# Altium PCB 矩形板V4.0.pcbdoc (part 2 of 2)
Units mm, origin at the board's own origin, x right, y up, seen from the top; angles counter-clockwise.
Board outline 153.79 x 190.97 mm, 2 copper layers (Top Layer, Bottom Layer); 164 components, 217 nets, 717 pads, 298 vias.
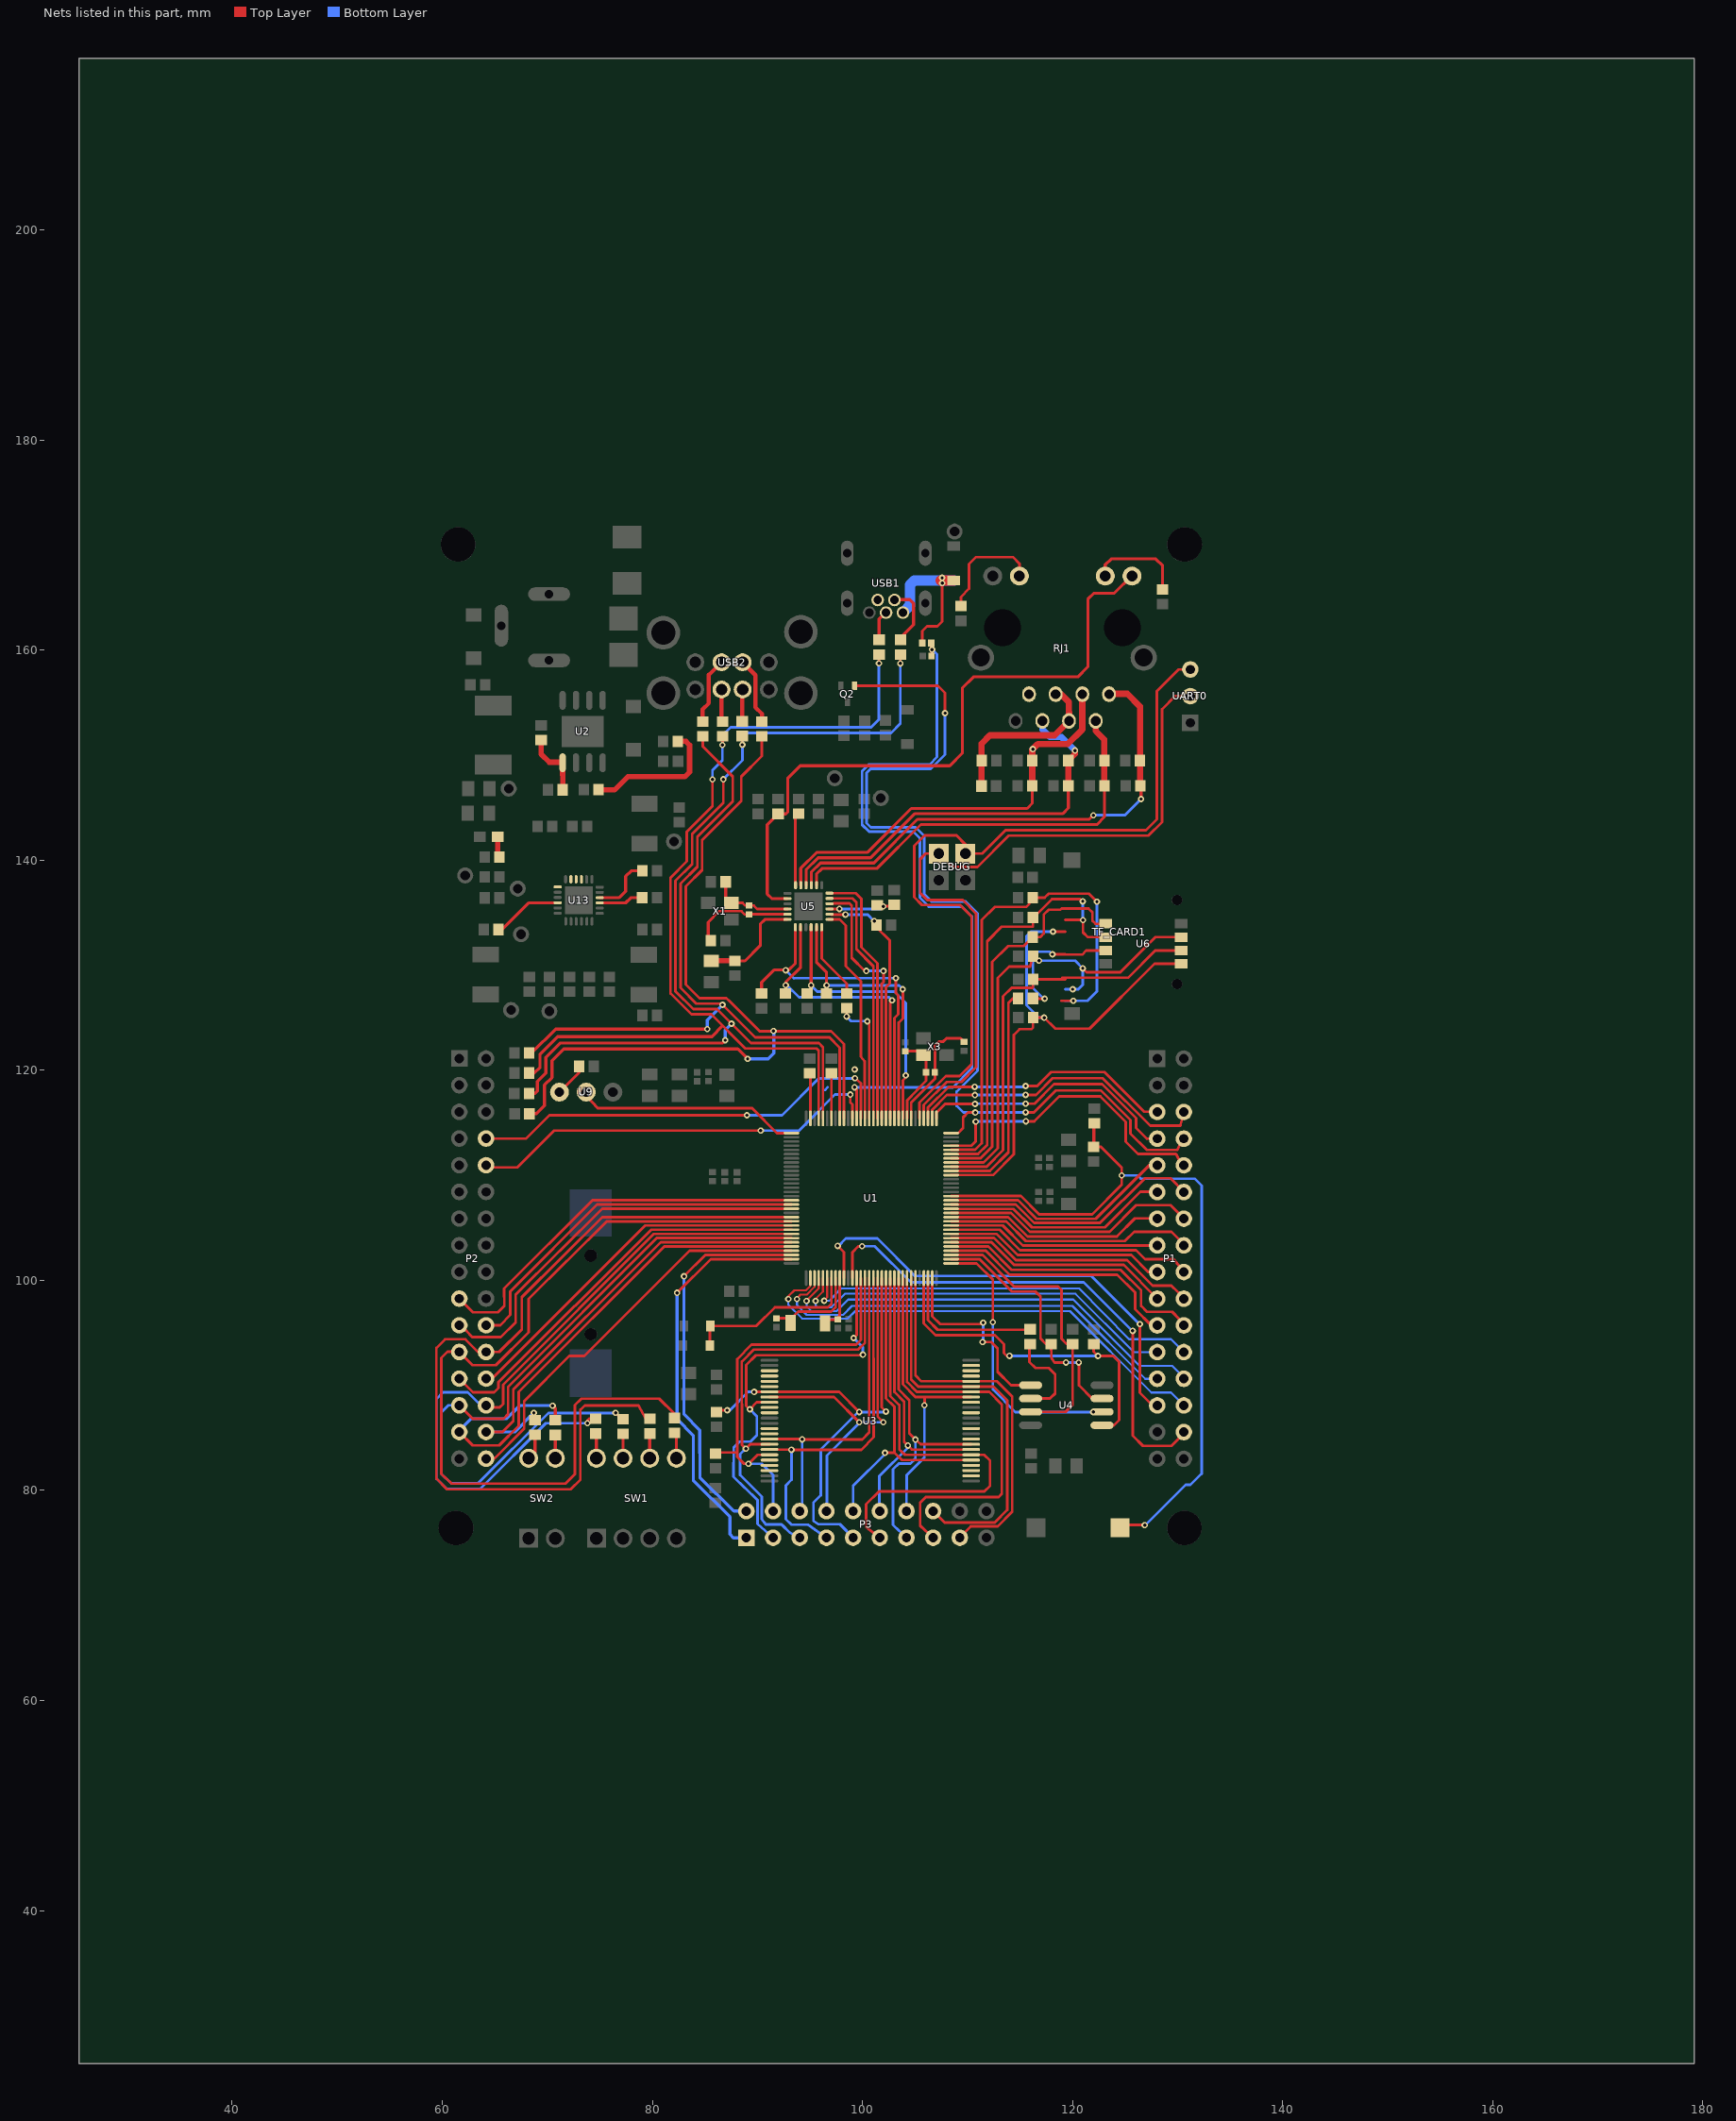
[diagram p2: the nets of this part, all layers, seen from the top]

## Via types
v1: diameter 0.61, hole 0.305, Top Layer to Bottom Layer, 298 vias

## Nets (pads, with @x,y where several pads share a name; then routed paths per layer and width w, separated by ;. In a path a pad name is that pad's centre, name@x,y a point inside that pad or via, vN(x,y) a via of type N, cw(c..) or ccw(c..) an arc to the next point about the centre after c; other vN are vias at no path point) (continued)
PA10: P2.19 U1.17 | length 37.6
  Top Layer w0.254: P2.19@61.621,98.259 62.921,96.959 65.301,96.959 65.903,97.561 65.893,99.222 74.303,107.619 U1.17@93.241,107.619
PA11: P2.22 U1.18 | length 35.2
  Top Layer w0.254: P2.22@64.161,95.719 65.512,95.719 66.48,96.695 66.48,98.93 74.727,107.221 U1.18@93.241,107.221
PA12: P2.21 U1.19 | length 38.7
  Top Layer w0.254: P2.21@61.601,95.719 61.799,95.719 62.848,94.609 65.583,94.604 66.983,95.996 66.98,98.635 75.223,106.819 U1.19@93.241,106.819
PB0: P2.32 U1.29 | length 38.8
  Top Layer w0.254: P2.32@64.161,83.019 64.931,83.019 67.796,85.882 67.788,88.488 72.088,92.793 73.518,92.796 83.541,102.819 U1.29@93.241,102.819
PB1: P1.26 U1.36 | length 42.9
  Top Layer w0.2: v1@94.72,98.099 95.84,99.217 U1.36@95.839,100.219
  Bottom Layer w0.2: v1(94.681,98.039) 94.682,97.538 95.162,97.058 97.521,97.058 98.641,98.178 120.071,98.178 126.401,91.849 129.491,91.849 P1.26@130.711,90.629
PB2: P1.24 U1.38 | length 39.6
  Top Layer w0.2: v1@96.341,98.099 96.64,98.398 U1.38@96.64,100.219
  Bottom Layer w0.2: v1(96.361,98.059) 96.874,98.059 97.973,99.22 120.625,99.22 125.38,94.386 129.37,94.389 130.6,93.169 P1.24@130.711,93.169
PB3: P1.23 U1.37 | length 38.4
  Top Layer w0.2: v1@95.56,98.099 95.56,98.259 96.241,98.938 U1.37@96.241,100.219
  Bottom Layer w0.2: v1@95.54,98.038 95.54,97.599 95.7,97.439 97.041,97.439 98.321,98.719 120.27,98.719 125.822,93.169 P1.23@128.171,93.169
  other v1: 95.541,98.039
PB4: P3.1 U1.31 | length 39
  Top Layer w0.254: v1(82.351,98.809) 85.563,102.021 U1.31@93.241,102.021
  Bottom Layer w0.3: v1(82.351,98.809) 82.351,86.799 83.901,85.249 83.901,80.949 87.371,77.479 87.371,75.839 87.721,75.489 P3.1@88.951,75.489
PB5: P1.25 U1.35 | length 41.6
  Top Layer w0.2: v1(93.761,98.219) 93.761,98.319 93.981,98.539 94.081,98.639 94.701,98.639 95.441,99.379 U1.35@95.441,100.219
  Bottom Layer w0.2: v1@93.76,98.219 93.76,97.66 94.161,97.238 94.682,96.718 98.161,96.718 99,97.558 119.99,97.558 126.922,90.629 P1.25@128.171,90.629
PB6: P3.2 U1.30 | length 36.6
  Top Layer w0.254: v1(83.011,100.389) 85.042,102.42 U1.30@93.241,102.42
  Bottom Layer w0.3: v1(83.011,100.389) 83.011,87.251 84.522,85.74 84.526,81.235 87.766,78.029 P3.2@88.951,78.029
PB7: P1.28 U1.34 | length 46.4
  Top Layer w0.2: v1(92.941,98.219) 92.942,98.478 93.511,99.049 94.631,99.049 95.042,99.461 U1.34@95.042,100.219
  Bottom Layer w0.2: v1(92.941,98.219) 92.942,97.678 94.26,96.36 98.601,96.36 99.32,97.078 119.751,97.078 127.519,89.309 129.37,89.309 130.6,88.089 P1.28@130.711,88.089
PB8: P1.27 U1.42 | length 44.5
  Top Layer w0.25: v1(97.641,103.279) 98.24,102.68 U1.42@98.24,100.219 ; v1(126.411,95.839) 126.411,89.309 127.631,88.089 P1.27@128.171,88.089
  Bottom Layer w0.25: v1@97.641,103.271 97.722,103.271 98.42,103.982 101.42,103.982 104.981,100.418 121.771,100.418 126.348,95.841 v1(126.411,95.839)
PB13: P1.10 U1.93 | length 29.3
  Top Layer w0.254: U1.93@108.44,112.82 110.382,112.82 110.781,113.219 v1(110.781,115.119) ; v1(115.561,115.139) 116.36,115.138 118.723,117.5 122.652,117.5 125.065,115.072 125.07,113.192 126.228,112.029 129.833,112.029 130.414,110.949 P1.10@130.711,110.949
  Bottom Layer w0.254: v1(110.781,115.119) 110.801,115.139 v1(115.561,115.139)
PC0: P1.30 U1.44 | length 48.6
  Top Layer w0.25: U1.44@99.04,100.219 99.04,102.659 99.602,103.218 v1@99.96,103.238 ; v1(125.731,95.189) 125.731,85.209 126.701,84.239 129.414,84.239 P1.30@130.711,85.549
  Bottom Layer w0.25: v1@99.96,103.238 101.181,103.238 104.621,99.819 121.061,99.819 125.691,95.189 v1(125.731,95.189)
  other v1: 99.961,103.239
PC1: P3.3 U1.45 U3.9 | length 41.5
  Top Layer w0.25: U3.9@91.151,88.389 89.932,88.389 v1(89.287,87.726) 88.941,88.031 88.935,91.939 89.852,92.868 99.98,92.868 v1(100.041,92.929) ; v1(99.161,94.509) 99.443,94.792 U1.45@99.443,100.226
  Bottom Layer w0.25: v1(89.287,87.726) 89.95,87.058 89.95,85.247 89.342,84.64 88.311,84.64 87.74,84.068 87.732,81.305 90.021,79.072 90.021,76.814 P3.3@91.491,75.489 ; v1(99.161,94.509) 100.041,93.629 v1(100.041,92.929)
PC2: P3.4 R29.2 U1.46 U3.19 | length 39.8
  Top Layer w0.25: R29.2@85.896,83.619 88.032,83.619 ; U3.19@91.151,83.389 90.009,83.389 v1(89.149,82.529) 88.73,82.529 88.07,83.19 88.07,92.499 89.442,93.868 99.391,93.868 99.843,94.32 U1.46@99.843,100.225
  Bottom Layer w0.25: v1(89.149,82.529) 90.43,82.529 91.491,81.47 P3.4@91.491,78.029
PC3: P3.5 U1.47 U3.17 | length 41.6
  Top Layer w0.25: v1(88.896,83.964) 88.527,84.333 88.514,92.252 89.67,93.408 99.602,93.408 100.244,94.048 U1.47@100.244,100.225 ; v1(88.896,83.964) 89.321,84.389 U3.17@91.151,84.389
  Bottom Layer w0.25: v1(88.896,83.964) 88.36,83.446 88.36,81.46 90.412,79.408 90.412,77.244 90.795,76.756 92.291,76.758 92.373,76.687 93.061,75.999 93.914,75.488 P3.5@94.031,75.489
PC4: P3.6 U1.48 U3.16 | length 31.4
  Top Layer w0.25: U3.16@91.151,84.889 94.221,84.889 v1(94.251,84.859) ; v1@94.25,84.858 99.98,84.858 100.643,85.521 U1.48@100.643,100.225
  Bottom Layer w0.25: P3.6@94.031,78.029 94.251,78.249 v1(94.251,84.859)
PC5: P3.7 U1.49 U3.18 | length 36.9
  Top Layer w0.25: U3.18@91.151,83.889 93.221,83.889 v1(93.241,83.869) 99.894,83.868 101.06,85.064 U1.49@101.044,100.223
  Bottom Layer w0.25: v1(93.241,83.869) 93.241,81.01 92.7,80.469 92.7,77.269 93.244,76.736 94.809,76.741 P3.7@96.571,75.489
PC6: P3.8 U1.50 U3.8 | length 35.5
  Top Layer w0.25: U3.8@91.151,88.889 97.3,88.889 v1(99.7,86.49) ; U1.50@101.442,100.226 101.442,87.033 v1(101.986,86.49)
  Bottom Layer w0.25: P3.8@96.571,78.029 96.611,78.069 96.611,83.329 99.7,86.418 v1(99.7,86.49) v1(101.986,86.49)
PC7: P3.9 R28.1 U1.51 U3.7 | length 47.3
  Top Layer w0.25: R28.1@86.111,87.444 86.3,87.633 v1(87.127,87.633) ; U3.7@91.151,89.389 97.772,89.389 v1(99.7,87.462) ; U1.51@101.844,100.226 101.844,87.902 v1(102.24,87.506)
  Top Layer w0.3: v1(89.691,89.379) 89.701,89.389 U3.7@91.151,89.389
  Bottom Layer w0.25: v1(87.127,87.633) 87.381,87.633 89.127,89.379 v1(89.691,89.379) ; P3.9@99.111,75.489 97.857,76.779 95.792,76.779 95.332,77.099 95.332,78.818 96.04,79.53 96.04,83.908 99.594,87.462 v1(99.7,87.462) ; v1(99.7,87.462) 102.196,87.462 v1(102.24,87.506)
PC8: P3.10 U1.52 U3.29 | length 32.3
  Top Layer w0.25: v1(102.151,83.579) 103.051,83.579 ; U1.52@102.243,100.225 102.243,88.773 103.051,87.965 103.051,83.578 ; U3.29@110.351,82.89 103.749,82.89 103.051,83.578
  Bottom Layer w0.25: P3.10@99.111,78.029 99.111,80.429 102.151,83.468 v1(102.151,83.579)
PC9: P3.11 U1.53 U3.30 | length 44.5
  Top Layer w0.25: P3.11@101.651,75.489 100.361,76.52 100.361,78.679 101.588,79.908 111.608,79.908 112.152,80.449 112.152,82.829 111.59,83.388 U3.30@110.351,83.389 104.059,83.388 103.511,83.911 103.511,88.14 102.644,88.996 U1.53@102.644,100.225
PC10: P3.12 U1.54 U3.31 | length 30.1
  Top Layer w0.25: U1.54@103.043,100.225 103.043,89.369 103.97,88.44 103.97,84.629 v1(104.331,84.269) 104.711,83.889 U3.31@110.351,83.889
  Bottom Layer w0.25: P3.12@101.651,78.029 101.611,78.069 101.611,81.368 104.331,84.089 v1(104.331,84.269)
PC11: P3.13 U1.55 U3.32 | length 32.9
  Top Layer w0.25: U1.55@103.445,100.225 103.439,89.606 104.461,88.587 104.461,85.419 v1(105.041,84.839) ; v1@105.04,84.838 105.548,84.389 U3.32@110.351,84.389
  Bottom Layer w0.25: P3.13@104.191,75.489 102.921,76.728 102.921,82.009 103.47,82.56 104.57,82.56 105.041,83.031 v1(105.041,84.839)
PC12: P3.14 U1.56 U3.41 | length 28.7
  Top Layer w0.25: U1.56@103.843,100.226 103.843,90.094 105.047,88.889 U3.41@110.351,88.889 ; v1(105.901,88.109) 105.912,88.12 105.912,88.889
  Bottom Layer w0.25: P3.14@104.191,78.029 104.212,81.45 105.901,83.139 v1(105.901,88.109)
PC13: P3.15 U1.57 U3.42 | length 40.3
  Top Layer w0.25: U1.57@104.244,100.226 104.244,90.327 105.182,89.389 U3.42@110.351,89.389 ; P3.15@106.731,75.489 105.492,76.639 105.492,78.818 106.028,79.359 112.97,79.359 113.269,79.669 113.272,88.186 112.07,89.39 U3.42@110.351,89.39
PC14: P3.16 U1.58 U3.43 | length 38.1
  Top Layer w0.25: U1.58@104.643,100.226 104.643,90.564 105.318,89.889 U3.43@110.351,89.889 ; P3.16@106.731,78.029 107.831,76.939 112.591,76.939 113.79,78.138 113.79,88.569 112.472,89.888 U3.43@110.351,89.889
PC15: P3.17 U1.59 U3.44 | length 36.3
  Top Layer w0.25: U1.59@105.045,100.225 105.045,90.967 105.623,90.389 U3.44@110.351,90.389 112.82,90.388 114.25,88.961 114.25,77.947 112.871,76.568 110.308,76.568 P3.17@109.231,75.488
PD8: P1.21 U1.68 | length 23.5
  Top Layer w0.254: U1.68@108.441,102.819 111.743,102.819 114.021,100.538 124.25,100.538 125.972,98.844 125.969,97.241 127.511,95.699 P1.21@128.047,95.699
PD9: P1.22 U1.69 | length 26.3
  Top Layer w0.254: U1.69@108.441,103.22 111.982,103.22 114.201,100.998 124.572,100.998 126.531,99.039 126.531,97.548 127.082,97 129.49,97 P1.22@130.711,95.709
PD10: P1.19 U1.70 | length 21.9
  Top Layer w0.254: U1.70@108.441,103.619 112.281,103.619 114.44,101.46 124.88,101.46 P1.19@128.061,98.249
PD11: P1.20 U1.71 | length 24.6
  Top Layer w0.254: U1.71@108.441,104.02 112.52,104.02 114.621,101.92 125.2,101.92 127.62,99.491 129.401,99.489 P1.20@130.711,98.249
PD12: P1.17 U1.72 | length 21.2
  Top Layer w0.254: U1.72@108.441,104.419 112.799,104.399 114.781,102.42 125.588,102.42 127.204,100.789 P1.17@128.171,100.789
PD13: P1.18 U1.73 | length 23.9
  Top Layer w0.254: U1.73@108.441,104.82 113.061,104.82 115.002,102.88 126.051,102.88 126.912,102.019 129.632,102.019 P1.18@130.6,100.789
PD14: P1.15 U1.74 | length 20.4
  Top Layer w0.254: U1.74@108.441,105.219 113.361,105.219 115.261,103.319 P1.15@128.061,103.329
PD15: P1.16 U1.75 | length 24
  Top Layer w0.254: U1.75@108.441,105.62 113.681,105.618 115.56,103.738 124.971,103.738 125.863,104.63 129.424,104.63 P1.16@130.711,103.329
PE10: P2.8 U1.115 | length 41.6
  Top Layer w0.254: P2.8@64.161,113.499 67.991,113.51 70.191,115.709 v1@89.002,115.709 ; v1@99.282,119.24 v1(99.281,119.239) 99.841,118.779 U1.115@99.84,115.42
  Bottom Layer w0.254: v1(89.001,115.719) 92.347,115.719 95.827,119.22 v1@99.282,119.22
PE11: R68.1 R69.2 U1.116 | length 71.9
  Top Layer w0.25: R68.1@106.545,160.679 106.545,160.274 106.631,160.189 v1(106.631,160.059)
  Top Layer w0.254: v1@99.071,118.379 v1(99.241,118.379) 99.442,118.178 U1.116@99.442,115.42 ; R69.2@106.585,159.429 106.585,160.013 v1(106.631,160.059)
  Bottom Layer w0.24: 96.441,118.119 96.681,118.379
  Bottom Layer w0.254: v1(99.241,118.379) 108.611,118.379 110.43,120.197 110.43,134.64 109.48,135.59 106.31,135.59 105.471,136.428 105.471,142.082 104.849,142.717 100.64,142.717 99.97,143.38 99.97,148.483 100.61,149.118 106.401,149.118 107.089,149.829 107.089,159.628 106.66,160.058 v1@106.63,160.058
  other v1: 99.261,120.079
PE12: P2.10 U1.117 | length 40.2
  Top Layer w0.254: P2.10@63.831,110.749 67.14,110.749 70.651,114.259 v1(90.321,114.259) ; v1(98.841,117.689) 98.841,116.94 99.04,116.741 U1.117@99.04,115.42
  Bottom Layer w0.254: v1(90.321,114.259) 93.965,114.259 97.395,117.689 v1(98.841,117.689)
PF7: P1.8 Q2.2 U1.96 | length 94.5
  Top Layer w0.254: Q2.2@99.231,156.609 101.011,156.609 101.021,156.599 107.181,156.599 107.862,155.918 v1(107.862,154) ; U1.96@108.441,114.02 109.101,114.02 109.581,114.498 109.581,115.519 110.041,115.979 v1(110.741,115.979) ; v1@115.54,115.999 116.32,115.999 118.39,118.069 122.71,118.069 125.522,115.257 125.52,113.959 127.072,112.41 129.98,112.41 130.473,113.489 P1.8@130.6,113.489
  Bottom Layer w0.254: v1(107.862,154) 107.862,150.05 106.5,148.689 100.77,148.689 100.402,148.318 100.402,143.52 100.79,143.129 105.07,143.129 105.88,142.318 105.88,136.768 106.571,136.078 109.82,136.078 110.95,134.95 110.95,119.938 108.961,117.95 108.961,116.619 109.602,115.979 v1@115.54,115.979
  other v1: 115.541,115.999
PF8: P1.7 U1.97 | length 25.4
  Top Layer w0.254: U1.97@107.041,115.42 107.041,115.958 107.882,116.799 v1(110.721,116.799) ; v1@115.54,116.819 116.381,116.819 118.23,118.668 122.83,118.668 126.051,115.437 126.051,114.518 127.087,113.482 P1.7@128.07,113.489
  Bottom Layer w0.254: v1(110.721,116.799) 110.741,116.819 v1@115.541,116.819
  other v1: 115.541,116.819
PF9: P1.6 U1.98 | length 28.9
  Top Layer w0.254: U1.98@106.64,115.42 106.64,116.238 108.041,117.639 v1(110.701,117.639) ; v1@115.54,117.66 116.52,117.66 118.111,119.25 122.876,119.25 127.392,114.739 130.264,114.739 P1.6@130.653,116.067
  Bottom Layer w0.254: v1(110.701,117.639) 115.521,117.639 v1@115.541,117.659
  other v1: 115.541,117.659
PF10: P1.5 U1.99 | length 25.8
  Top Layer w0.254: U1.99@106.241,115.42 106.241,116.459 108.201,118.419 v1(110.681,118.419) ; v1@115.54,118.498 116.64,118.498 117.971,119.829 123.041,119.829 126.81,116.06 P1.5@128.06,116.06
  Bottom Layer w0.254: v1(110.681,118.419) 115.461,118.419 v1@115.541,118.499
  other v1: 115.541,118.499
PG0: P2.29 R18.1 U1.28 | length 53.7
  Top Layer w0.254: P2.29@61.621,85.559 62.891,84.289 65.411,84.289 67.28,86.159 67.28,89.38 81.136,103.22 U1.28@93.241,103.22
  Top Layer w0.3: v1(70.501,88.069) 70.751,87.819 R18.1@70.751,86.679
  Bottom Layer w0.3: P2.29@61.291,85.349 62.772,86.829 66.132,86.829 67.384,88.082 v1(70.501,88.069)
PG1: P2.30 R19.1 U1.27 | length 44.4
  Top Layer w0.254: P2.30@64.161,85.559 65.731,85.559 66.762,86.588 66.762,89.621 80.813,103.619 U1.27@93.241,103.619
  Top Layer w0.3: v1(68.711,87.389) 68.711,86.799 R19.1@68.821,86.689
  Bottom Layer w0.3: P2.30@64.161,85.559 66.881,85.559 v1(68.711,87.389)
PG3: P2.27 R61.1 U1.26 | length 69.3
  Top Layer w0.254: P2.27@61.621,88.099 62.891,86.829 65.83,86.829 66.262,87.256 66.259,89.847 80.414,104.02 U1.26@93.241,104.02 ; v1(76.501,87.389) 77.101,86.789 R61.1@77.201,86.789
  Bottom Layer w0.25: P2.27@61.621,88.11 60.6,88.11 59.922,87.429 59.922,81.554 60.839,80.66 63.391,80.66 70.099,87.368 v1@76.5,87.368
PG5: P2.28 R60.1 U1.25 | length 68.7
  Top Layer w0.254: P2.28@63.831,87.889 65.461,87.889 65.792,88.219 65.792,90.058 80.125,104.419 U1.25@93.241,104.419 ; v1(73.811,86.399) 73.811,86.619 74.001,86.809 R60.1@74.591,86.809
  Bottom Layer w0.25: P2.28@63.831,87.889 63.871,87.889 62.431,89.329 60.069,89.329 59.442,88.696 59.442,81.114 60.435,80.129 63.592,80.129 69.861,86.398 v1(73.811,86.399)
PG6: P2.25 U1.24 | length 38.9
  Top Layer w0.254: P2.25@61.621,90.639 62.911,89.349 64.953,89.349 65.332,89.733 65.332,90.302 79.919,104.82 U1.24@93.241,104.82
PG7: P2.26 U1.23 | length 35.1
  Top Layer w0.254: P2.26@64.161,90.639 64.74,90.639 79.322,105.219 U1.23@93.241,105.219
PG8: P2.23 R62.1 U1.22 | length 83.4
  Top Layer w0.254: P2.23@61.621,93.179 62.881,91.92 65.101,91.92 68.22,95.036 68.22,98.221 75.657,105.62 U1.22@93.241,105.62 ; P2.23@61.621,93.2 60.491,93.2 59.922,92.628 59.922,81.579 60.882,80.642 71.74,80.65 72.632,81.541 72.632,88.13 73.241,88.74 80.651,88.74 82.101,87.289 R62.1@82.101,86.889
PG9: P2.24 R63.1 U1.21 | length 83.2
  Top Layer w0.25: P2.24@64.161,93.169 63.429,93.169 62.21,94.389 60.254,94.389 59.442,93.578 59.442,81.117 60.453,80.109 72.231,80.109 73.15,81.028 73.15,87.678 73.561,88.089 78.672,88.089 79.391,86.809 R63.1@79.761,86.809
  Top Layer w0.254: P2.24@64.161,93.179 65.418,93.179 67.575,95.323 67.567,98.389 75.23,106.019 U1.21@93.5,106.019
PG11: P1.13 U1.76 | length 21.1
  Top Layer w0.254: U1.76@108.441,106.019 113.881,106.019 115.72,104.178 124.225,104.178 125.946,105.899 P1.13@128.061,105.899
PG12: P1.14 U1.77 | length 24.5
  Top Layer w0.254: U1.77@108.441,106.42 114.141,106.42 115.941,104.62 123.521,104.62 126.061,107.16 129.34,107.16 P1.14@130.6,105.9
PG13: P1.11 U1.78 | length 21.8
  Top Layer w0.254: U1.78@108.441,106.819 114.382,106.799 116.139,105.039 123.071,105.039 126.47,108.44 P1.11@128.06,108.44
PG14: P1.12 U1.79 | length 25.2
  Top Layer w0.254: U1.79@108.441,107.221 114.58,107.218 116.34,105.458 122.611,105.458 126.894,109.72 129.32,109.72 P1.12@130.6,108.44
PG15: P1.9 U1.80 | length 22.5
  Top Layer w0.254: U1.80@108.441,107.619 114.821,107.619 116.559,105.859 122.21,105.859 127.331,110.98 P1.9@128.06,110.98
R9_2: LED4.1 R9.2 | length 2
  Top Layer w0.5: LED4.1@65.271,142.229 65.271,140.459 R9.2@65.441,140.289
R10_2: C44.1 R10.2 | length 12.9
  Top Layer w0.5: C44.1@75.131,146.679 76.391,146.679 77.661,147.949 83.092,147.949 83.541,148.399 83.541,150.959 83.191,151.31 R10.2@82.431,151.31
R11_2: R11.2 U13.10 | length 6
  Top Layer w0.3: U13.10@74.984,136.435 76.851,136.435 77.453,137.037 77.453,138.457 77.982,138.988 R11.2@79.054,138.988
R21_2: R21.2 R22.1 U2.5 | length 6.3
  Top Layer w0.5: R21.2@69.411,151.439 69.411,150.109 70.191,149.329 71.423,149.329 71.456,149.296 R22.1@71.461,146.718
R60_2: R60.2 SW1.8 | length 2.4
  Top Layer w0.3: R60.2@74.591,85.409 74.671,85.329 SW1.8@74.671,83.059
R61_2: R61.2 SW1.7 | length 2.3
  Top Layer w0.3: R61.2@77.201,85.389 77.201,83.069 SW1.7@77.211,83.059
R62_2: R62.2 SW1.5 | length 2.5
  Top Layer w0.3: R62.2@82.101,85.489 82.291,85.299 SW1.5@82.291,83.059
R63_2: R63.2 SW1.6 | length 2.4
  Top Layer w0.3: SW1.6@79.751,83.059 79.751,85.399 R63.2@79.761,85.409
R73_2: R73.2 U13.9 | length 4.3
  Top Layer w0.3: U13.9@74.984,135.937 77.453,135.937 77.944,136.427 R73.2@79.033,136.427
R74_1: R74.1 U13.22 | length 6.7
  Top Layer w0.28: R74.1@65.343,133.397 65.693,133.397 68.248,135.953 U13.22@70.986,135.952
RESET: C50.2 R64.1 SW3.2 U1.81 | length 70.9
  Top Layer w0.254: U1.81@108.441,108.021 115.09,108.021 116.82,106.288 121.862,106.288 124.681,109.107 v1(124.681,109.989) 124.681,110.729 122.703,112.707 R64.1@122.017,112.708 ; SW3.2@124.511,76.429 124.781,76.699 v1(126.871,76.699)
  Top Layer w0.3: R64.1@122.017,112.708 122.017,114.908 C50.2@122.067,114.958
  Bottom Layer w0.25: v1(124.681,109.989) 126.191,109.989 126.501,109.679 131.641,109.679 132.291,109.029 132.291,81.569 132.261,81.569 131.221,80.529 130.771,80.529 126.941,76.699 v1(126.871,76.699)
RJ1_4: C42.1 R17.1 RJ1.4 RJ1.5 | length 16.6
  Top Layer w0.6: C42.1@111.341,149.486 111.341,151.097 112.136,151.889 118.296,151.889 RJ1.4@119.666,153.264 ; R17.1@111.343,147.073 C42.1@111.343,149.486 ; RJ1.5@118.395,155.844 118.867,155.839 119.662,155.049 RJ1.4@119.665,153.304
RJ1_7: RJ1.7
RJ1_10: R46.2 RJ1.10 | length 9.2
  Top Layer w0.3: RJ1.10@123.116,167.094 123.112,168.12 123.681,168.689 127.92,168.689 128.57,168.038 R46.2@128.571,165.789
RJ1_11: R47.2 RJ1.11 | length 10.8
  Top Layer w0.254: R47.2@109.371,164.189 109.37,165.069 110.15,165.849 110.15,168.198 110.811,168.859 114.321,168.859 114.948,168.229 RJ1.11@114.946,167.054
RMIIOREFCLK: C23.2 U1.109 U5.14 | length 23.4
  Top Layer w0.254: U5.14@97.006,134.838 97.025,134.819 v1(98.381,134.819) ; C23.2@101.115,133.596 101.344,133.596 102.581,132.359 102.581,128.259 102.241,127.919 U1.109@102.241,115.42
  Bottom Layer w0.254: v1(98.381,134.819) 100.501,134.819 v1(101.121,134.199)
RMIOCRSDV: R36.2 U1.106 U5.11 | length 26.7
  Top Layer w0.254: U1.106@103.442,115.42 103.441,124.539 103.841,124.939 v1(103.841,127.719)
  Top Layer w0.28: U5.11@95.616,133.708 95.616,130.284 96.581,129.319 v1(96.581,128.079) R36.2@96.581,127.319
  Bottom Layer w0.254: v1(96.581,128.079) 103.48,128.079 v1(103.841,127.719)
RMIOMDC: U1.114 U5.13 | length 21
  Top Layer w0.254: U5.13@96.767,134.358 97.841,134.358 98.42,133.779 98.42,129.918 99.858,128.48 99.858,121.305 100.221,120.858 U1.114@100.242,115.42
RMIOMDIO: R43.1 U1.113 | length 12.3
  Top Layer w0.254: v1(98.501,125.119) R43.1@98.501,125.919 ; v1@100.461,124.659 100.64,124.479 U1.113@100.64,115.418
  Bottom Layer w0.254: v1(98.501,125.119) 98.501,125.099 98.921,124.679 100.441,124.679 v1@100.461,124.659
  other v1: 100.461,124.659
RMIORXD0: R34.2 U1.108 U5.8 | length 29
  Top Layer w0.254: U1.108@102.642,115.42 102.642,126.443 v1@102.82,126.659
  Top Layer w0.28: R34.2@92.66,127.32 92.7,127.358 v1(92.7,128.099) 92.7,128.386 94.113,129.796 U5.8@94.118,133.708
  Bottom Layer w0.254: v1(92.7,128.099) 92.802,128.099 93.96,126.939 102.54,126.939 v1@102.82,126.659
  other v1: 102.821,126.659
RMIORXD1: R35.2 U1.107 U5.7 | length 32.9
  Top Layer w0.254: U1.107@103.041,115.42 103.041,124.978 103.401,125.341 103.401,127.124 103.18,127.375 v1@103.18,128.78
  Top Layer w0.28: R35.2@90.401,127.299 90.401,128.119 90.401,128.371 91.572,129.543 92.969,129.543 93.604,130.178 93.617,130.19 U5.7@93.617,133.708
  Bottom Layer w0.254: v1(92.701,129.519) 93.46,128.76 v1@103.18,128.78
  other v1: 103.181,128.779
RMIORXER: R37.2 U1.105 U5.10 | length 27.4
  Top Layer w0.254: U1.105@103.841,115.42 103.841,119.039 104.12,119.319 v1(104.121,119.519)
  Top Layer w0.28: R37.2@94.721,127.299 95.117,127.695 v1(95.117,128.079) U5.10@95.117,133.708
  Bottom Layer w0.254: v1@95.116,128.079 95.7,127.5 103.041,127.5 104.12,126.42 v1(104.121,119.519)
RMIOTXD0: U1.112 U5.17 | length 23.9
  Top Layer w0.254: U5.17@96.861,136.36 99.039,136.36 99.421,135.978 99.421,131.518 101.042,129.898 U1.112@101.042,115.42
RMIOTXD1: U1.111 U5.18 | length 24.8
  Top Layer w0.254: U5.18@96.861,136.861 99.359,136.861 99.901,136.319 99.901,131.719 101.441,130.18 U1.111@101.441,115.42
RMIOTXEN: U1.110 U5.16 | length 24.9
  Top Layer w0.254: U5.16@96.767,135.857 97.261,135.899 98.761,135.899 98.982,135.679 98.982,130.698 100.221,129.458 v1(100.381,129.459) ; U1.110@101.842,115.42 101.842,128.226 102.001,128.385 v1(102.001,129.459)
  Bottom Layer w0.254: v1(100.381,129.459) v1(102.001,129.459)
RTCVD: D4.2 D5.2 U1.39 | length 16.8
  Top Layer w0.25: D5.2@85.471,93.779 85.471,95.599 D4.2@85.531,95.659 ; D4.2@85.53,95.659 89.901,95.659 91.662,97.419 96.719,97.419 97.044,97.741 U1.39@97.044,100.225
RXD0: DEBUG.c U1.100 UART0.2 | length 71.3
  Top Layer w0.254: U1.100@105.842,115.418 105.842,116.7 108.032,118.889 109.421,118.889 110.831,120.299 110.831,134.919 109.551,136.199 106.17,136.199 105.492,136.878 105.492,140.098 106.02,140.629 DEBUG.c@107.261,140.629 107.29,140.629 108.56,139.359 110.966,139.359 113.92,142.339 127.232,142.339 128.509,143.616 128.509,143.835 128.517,154.376 129.762,155.618 UART0.2@131.209,155.618
RXN: C38.1 R40.1 RJ1.6 U5.22 | length 39.4
  Top Layer w0.28: U5.22@94.632,137.619 94.633,139.08 95.781,140.228 100.77,140.228 104.961,144.419 119.05,144.419 119.602,144.97 R40.1@119.601,147.073
  Top Layer w0.6: R40.1@119.601,147.073 C38.1@119.601,149.486 120.231,150.116 v1(120.231,150.439)
  Bottom Layer w0.6: RJ1.6@117.126,153.304 117.126,152.471 117.872,151.725 118.945,151.725 v1(120.231,150.439)
RXP: C37.1 R38.1 RJ1.3 U5.23 | length 40.3
  Top Layer w0.28: U5.23@94.13,137.619 94.13,139.23 95.632,140.728 100.45,140.728 104.651,144.929 115.68,144.929 116.173,145.42 R38.1@116.172,147.073
  Top Layer w0.6: R38.1@116.172,147.073 C37.1@116.172,149.486 116.172,150.525 v1(116.222,150.575) ; v1@116.221,150.576 116.716,151.069 119.561,151.069 120.935,152.443 RJ1.3@120.935,155.844
S$12: 
S$14: 
S$19: 
S$28: 
S$30: 
S$44: 
S$47: 
S$48: 
S$49: 
S$50: 
S$53: 
S$54: 
S$55: 
S$57: 
S$61: 
S$67: 
S$69: 
S$71: 
S$73: 
S$77: 
S$79: 
S$81: 
S$2331: 
SD_CD: R24.1 TF_CARD1.9 U1.92 | length 49.9
  Top Layer w0.25: U1.92@108.443,112.425 110.734,112.425 111.362,113.052 111.362,134.317 112.594,135.549 115.571,135.549 116.221,136.199 R24.1@116.221,136.439 117.351,136.438 117.722,136.809 121.562,136.809 v1(122.322,136.05) ; TF_CARD1.9@118.951,126.609 v1(120.071,126.608)
  Bottom Layer w0.25: 119.32,126.608 v1(120.071,126.608) 121.42,126.608 122.322,127.508 v1(122.322,136.05)
SD_CLK: R15.1 U1.87 | length 21.5
  Top Layer w0.25: U1.87@108.443,110.426 112.136,110.426 113.902,112.191 113.902,126.428 114.311,126.84 R15.1@114.831,126.839
SD_CLK-P: R15.2 TF_CARD1.5 U6.3 | length 15
  Top Layer w0.25: v1(118.091,131.039) 119.291,131.039 119.321,131.009 ; TF_CARD1.5@118.951,131.009 120.921,131.009 121.301,131.389 121.316,131.404 U6.3@123.491,131.404 ; R15.2@116.231,126.839 116.251,126.819 v1(117.341,126.819) 117.321,126.839 R15.2@116.231,126.839
  Bottom Layer w0.25: v1(117.341,126.819) 117.242,126.819 116.241,127.82 116.241,131.018 116.51,131.29 117.84,131.29 v1(118.091,131.039)
SD_CMD: R72.1 TF_CARD1.3 U1.86 U6.5 | length 51.3
  Top Layer w0.25: U1.86@108.443,110.025 112.436,110.025 114.42,112.008 114.42,123.37 114.958,123.908 116.063,123.908 116.241,124.086 R72.1@116.241,125.019 ; v1(118.141,133.199) 119.311,133.199 119.321,133.209
  Top Layer w0.254: R72.1@116.241,125.019 117.29,125.019 v1(117.301,125.009) 118.352,123.959 121.631,123.959 127.806,130.134 U6.5@130.691,130.134
  Bottom Layer w0.25: v1(117.301,125.009) 116.801,125.009 115.621,126.189 115.621,132.769 116.051,133.199 v1(118.141,133.199)
SD_D0: R71.1 TF_CARD1.7 U1.88 U6.6 | length 40.2
  Top Layer w0.25: U1.88@108.443,110.825 111.834,110.825 113.391,112.381 113.391,127.03 114.212,127.85 116.185,127.848 116.241,127.903 R71.1@116.241,128.669 119.321,128.669 119.321,128.809 ; 119.038,128.808 125.271,128.808 127.867,131.404 U6.6@130.691,131.404
SD_D1: R70.1 TF_CARD1.8 U1.89 U6.7 | length 45.7
  Top Layer w0.25: U1.89@108.443,111.226 111.537,111.226 112.881,112.57 112.881,128.795 113.96,129.875 115.703,129.87 115.967,129.87 116.241,130.868 116.371,130.869 v1(116.801,130.439) ; v1(120.021,127.719) v1@120.051,127.749
  Top Layer w0.254: v1(120.971,129.699) 121.341,129.319 124.549,129.319 127.905,132.674 U6.7@130.691,132.674
  Bottom Layer w0.25: v1(116.801,130.439) 120.231,130.439 v1(120.971,129.699) 120.971,128.14 120.925,128.094 120.549,127.718 v1(120.021,127.719) 119.32,127.719 119.32,127.708
SD_D2: R26.1 TF_CARD1.1 U1.90 U6.1 | length 37.3
  Top Layer w0.25: U1.90@108.443,111.625 111.247,111.625 112.351,112.728 112.351,130.307 113.871,131.828 115.36,131.828 R26.1@116.221,132.689 ; R26.1@116.221,132.689 116.95,132.689 117.26,132.999 117.26,134.808 117.74,135.288 118.829,135.288 TF_CARD1.1@118.951,135.409 ; 118.957,135.399 121.53,135.399 121.891,135.039 121.891,134.239 122.131,133.999 122.186,133.944 U6.1@123.491,133.944
SD_D3: R25.1 TF_CARD1.2 U1.91 U6.2 | length 41.8
  Top Layer w0.25: U1.91@108.443,112.026 111.014,112.026 111.871,112.883 111.871,132.279 113.262,133.67 116.236,133.67 116.231,133.675 R25.1@116.231,134.549 116.3,134.549 118.039,136.288 120.761,136.288 v1(120.971,136.079) ; 119.32,134.31 120.96,134.31 v1@121.001,134.348 ; v1(121.001,134.299) 121.001,133.129 121.456,132.674 U6.2@123.49,132.674
  Bottom Layer w0.25: v1(120.971,136.079) 120.971,134.378 v1@121.001,134.348
SPEED_LED: R48.2 RJ1.9 U5.2 | length 62.5
  Top Layer w0.28: R48.2@91.965,144.41 90.937,143.381 90.937,143.005 90.937,136.782 91.368,136.35 U5.2@92.861,136.35 ; R48.2@91.966,144.411 92.703,144.411 92.901,144.609 92.901,147.82 94.072,148.988 108.311,148.988 109.5,150.18 109.5,156.387 110.562,157.449 120.501,157.449 121.461,158.409 121.461,164.838 122.05,165.43 123.978,165.43 RJ1.9@125.657,167.093
SPI_CLK: R16.2 U1.62 | length 14
  Top Layer w0.254: U1.62@106.241,100.219 106.241,96.219 107.161,95.299 R16.2@115.901,95.299
SPI_CS: R30.1 U1.61 U4.1 | length 33.6
  Top Layer w0.254: U1.61@105.842,100.22 105.842,95.897 106.96,94.78 112.601,94.78 113.46,93.919 113.46,93.078 113.732,92.809 v1(114.001,92.809) ; R30.1@122.02,93.919 122.02,93.2 v1(122.421,92.799) 123.876,92.798 124.43,92.24 124.43,86.7 123.935,86.205 U4.1@122.81,86.205
  Bottom Layer w0.254: v1(114.001,92.809) 114.011,92.799 v1(122.421,92.799)
SPI_D3: R31.1 U1.67 U4.7 | length 27.9
  Top Layer w0.254: U1.67@108.441,102.42 111.44,102.42 114.44,99.418 118.621,99.418 118.961,99.08 118.961,94.439 119.462,93.939 R31.1@120.001,93.939 ; U4.7@116.011,87.474 119.336,87.474 120.001,88.139 R31.1@120.001,93.939
SPI_DI: U1.65 U4.2 | length 26.4
  Top Layer w0.254: U1.65@108.441,101.62 110.861,101.62 112.421,100.061 v1(112.421,96.009) ; v1(121.971,87.459) 122.796,87.459 U4.2@122.811,87.474
  Bottom Layer w0.254: v1(112.421,96.009) 112.421,89.598 114.56,87.459 v1(121.971,87.459)
SPI_DO: U1.63 U4.5 | length 18.4
  Top Layer w0.254: U1.63@106.64,100.219 106.64,96.58 107.391,95.829 111.491,95.829 v1(111.491,95.969) ; v1(111.441,94.129) 112.251,94.129 112.861,93.519 112.861,91.289 114.136,90.014 U4.5@116.011,90.014
  Bottom Layer w0.254: v1(111.441,94.129) 111.491,94.179 v1(111.491,95.969)
SPI_WP: R32.1 U1.66 U4.3 | length 24.3
  Top Layer w0.254: U1.66@108.441,102.021 111.159,102.021 114.24,98.938 116.46,98.938 116.96,98.44 116.96,94.439 117.46,93.939 R32.1@117.961,93.939 117.981,92.619 118.281,92.179 v1(119.381,92.179) ; v1(120.601,92.179) 120.601,89.999 121.856,88.744 U4.3@122.811,88.744
  Bottom Layer w0.254: v1(119.381,92.179) v1(120.601,92.179)
SW2_3: R18.2 SW2.3 | length 2.3
  Top Layer w0.3: R18.2@70.751,85.279 70.751,83.019 SW2.3@70.761,83.009
SW2_4: R19.2 SW2.4 | length 2.5
  Top Layer w0.3: SW2.4@68.221,83.009 68.821,83.609 R19.2@68.821,85.289
TXD0: DEBUG.a U1.101 UART0.3 | length 75.4
  Top Layer w0.254: U1.101@105.441,115.418 105.441,116.939 107.94,119.438 109.251,119.438 110.391,120.578 110.391,134.627 109.292,135.73 105.68,135.73 104.941,136.469 104.941,141.368 105.931,142.359 108.961,142.359 109.802,141.488 DEBUG.a@109.801,140.629 111.4,140.629 113.63,142.859 126.983,142.859 128.019,143.896 128.029,156.088 130.102,158.158 UART0.3@131.209,158.158
TXN: C36.1 R42.1 RJ1.2 U5.20 | length 40.3
  Top Layer w0.28: U5.20@95.63,137.619 95.632,138.699 96.14,139.209 101.367,139.209 105.565,143.398 122.35,143.398 123.031,144.117 R42.1@123.03,147.073
  Top Layer w0.6: RJ1.2@122.206,153.304 122.205,152.303 123.023,151.485 C36.1@123.03,149.486 ; R42.1@123.03,147.073 C36.1@123.03,149.486
TXP: C35.1 R41.1 RJ1.1 U5.21 | length 47.8
  Top Layer w0.28: U5.21@95.129,137.619 95.129,138.859 96.01,139.738 101.1,139.738 105.23,143.888 121.59,143.888 v1(121.981,144.279)
  Top Layer w0.3: R41.1@126.459,147.073 126.522,147.01 v1(126.522,145.825)
  Top Layer w0.6: RJ1.1@123.475,155.844 125.215,155.844 126.421,154.637 C35.1@126.422,149.475 ; C35.1@126.422,149.475 126.422,147.11 R41.1@126.459,147.073
  Bottom Layer w0.28: v1(121.981,144.279) 124.976,144.279 v1(126.522,145.825)
U3_3: U3.3
U3_4: U3.4
U3_5: U3.5
U3_6: U3.6
U3_10: U3.10
U3_11: U3.11
U3_14: U3.14
U3_15: U3.15
U3_20: U3.20
U3_21: U3.21
U3_22: U3.22
U3_26: U3.26
U3_27: U3.27
U3_28: U3.28
U3_33: U3.33
U3_35: U3.35
U3_38: U3.38
U3_40: U3.40
U3_45: U3.45
U3_46: U3.46
U3_47: U3.47
U4_6: R16.1 U4.6 | length 9
  Top Layer w0.254: R16.1@115.901,93.898 115.901,92.23 116.471,91.658 117.741,91.658 118.341,91.059 118.341,89.229 117.856,88.744 U4.6@116.011,88.744
U5_6: C33.1 C34.1 U5.6 | length 10.1
  Top Layer w0.28: C34.1@87.867,130.408 88.816,130.409 90.266,131.857 90.266,133.909 90.709,134.351 U5.6@92.861,134.351
  Top Layer w0.5: C33.1@85.617,130.424 87.851,130.424 C34.1@87.867,130.408
U5_12: R43.2 U5.12 | length 7.4
  Top Layer w0.254: U5.12@96.117,133.708 96.117,130.643 97.441,129.319 98.321,128.439 98.501,128.259 R43.2@98.501,127.319
U5_15: C43.2 R14.1 U5.15 | length 7.3
  Top Layer w0.254: U5.15@96.767,135.357 96.768,135.359 v1(97.801,135.359)
  Top Layer w0.28: R14.1@101.067,135.608 v1(101.981,135.608) 102.879,135.608 C43.2@103.017,135.469
  Bottom Layer w0.254: v1(97.801,135.359) 101.732,135.359 v1(101.981,135.608)
U5_24: R49.2 U5.24 | length 7
  Top Layer w0.28: U5.24@93.617,137.508 93.617,144.104 93.921,144.407 R49.2@93.921,144.419
U9_3: R20.1 U9.3 | length 3.2
  Top Layer w0.254: U9.3@71.161,117.919 73.021,119.779 R20.1@73.021,120.359
U13_15: U13.15
U13_16: U13.16
U13_17: U13.17
U13_19: U13.19
USB0_DM: R12.2 R33.2 R53.2 U1.124 | length 96.9
  Top Layer w0.25: v1(103.611,158.729) 103.611,159.589 R12.2@103.64,159.618
  Top Layer w0.254: v1(86.752,147.698) 86.752,145.468 83.79,142.509 83.79,139.628 82.2,138.038 82.2,127.508 83.892,125.818 86.142,125.818 v1(87.531,124.429) 89.381,122.58 95.84,122.58 96.241,122.179 U1.124@96.241,115.418 ; R53.2@88.551,151.819 88.551,151.009 v1(88.571,150.989)
  Top Layer w0.3: R33.2@68.251,117.789 68.822,117.79 69.05,118.018 69.05,118.938 69.851,119.738 69.851,121.208 71.24,122.598 86.691,122.598 86.691,122.609 v1(86.941,122.859)
  Bottom Layer w0.254: v1(86.752,147.698) 88.571,149.517 v1(88.571,150.989) ; v1@88.57,150.99 88.57,151.678 89.02,152.128 102.721,152.128 103.611,153.018 v1(103.611,158.729)
  Bottom Layer w0.3: v1(86.941,122.859) 86.941,123.839 v1(87.531,124.429)
USB0_DM_E: R53.1 USB2.2 | length 3
  Top Layer w0.4: R53.1@88.551,153.219 88.551,156.209 USB2.2@88.591,156.249
USB0_DP: R13.2 R27.2 R54.2 U1.125 | length 93
  Top Layer w0.254: v1(85.721,147.679) 85.72,145.138 83.272,142.699 83.272,139.88 81.73,138.338 81.73,127.299 83.711,125.318 85.601,125.318 88.85,122.069 95.632,122.069 95.84,121.859 U1.125@95.839,115.418 ; v1(86.671,150.969) 86.681,150.979 R54.2@86.681,151.809 ; v1@101.571,158.749 101.591,158.769 R13.2@101.591,159.589
  Top Layer w0.3: R27.2@68.271,119.739 68.751,119.738 69.302,120.289 69.302,121.539 70.971,123.21 85.677,123.21 86.661,124.219
  Bottom Layer w0.254: v1(85.721,147.679) 85.721,148.559 86.671,149.509 v1(86.671,150.969) 86.671,151.869 87.441,152.639 100.821,152.639 101.571,153.389 v1(101.571,158.749)
USB0_DP_E: R54.1 USB2.3 | length 3.1
  Top Layer w0.4: USB2.3@86.589,156.249 86.589,153.3 R54.1@86.681,153.209
USB0_ID: U1.1 U9.2 | length 21.4
  Top Layer w0.26: U9.2@73.701,117.919 73.77,117.848 73.781,117.499 74.801,116.38 89.5,116.38 91.86,114.02 U1.1@93.241,114.02
USB0_REXT: R51.2 U1.127 | length 4.4
  Top Layer w0.254: R51.2@94.971,119.71 95.06,119.71 U1.127@95.06,115.42
USB1_1: D6.1 R68.2 USB1.1 | length 15.6
  Top Layer w0.25: R68.2@105.697,160.679 105.697,161.814 106.161,162.279 107.141,162.279 107.591,162.729 v1(107.591,166.379)
  Top Layer w1: v1@107.447,166.629 108.676,166.629 D6.1@108.691,166.643
  Bottom Layer w1: USB1.1@103.851,163.614 103.973,163.72 104.522,164.269 104.522,166.237 104.923,166.639 107.63,166.629 108.751,166.629
  other v1: 107.581,166.889
USB1_2: R12.1 USB1.2 | length 6.2
  Top Layer w0.3: USB1.2@103.051,164.818 104.494,164.818 104.862,164.449 104.862,162.41 103.442,160.99 R12.1@103.64,160.99
USB1_3: R13.1 USB1.3 | length 2.9
  Top Layer w0.3: R13.1@101.591,160.989 101.591,162.953 USB1.3@102.25,163.613
USB1_4: USB1.4
USB1_DM: R39.1 R58.2 U1.119 | length 82.4
  Top Layer w0.254: R58.2@90.419,151.808 90.419,149.918 88.461,147.96 88.461,145.638 84.73,141.909 84.73,139.059 83.17,137.5 83.17,128.178 84.481,126.87 87.059,126.87 87.381,126.549 90.211,123.718 97.021,123.718 98.24,122.499 U1.119@98.24,115.418
  Top Layer w0.3: R39.1@68.291,115.859 68.971,115.859 69.731,116.619 69.731,118.599 70.441,119.309 70.441,120.909 71.551,122.019 88.131,122.019 v1(89.071,121.079) ; v1(91.531,123.739) 91.531,123.718 92.12,123.718
  Bottom Layer w0.3: v1(89.071,121.079) 91.031,121.079 91.561,121.609 91.561,123.709 v1(91.531,123.739)
USB1_DM_E: R58.1 USB2.6 | length 6.4
  Top Layer w0.4: USB2.6@88.591,158.85 89.821,157.609 89.821,154.549 90.421,153.949 R58.1@90.421,153.209
USB1_DP: R23.1 R59.2 U1.120 | length 72.2
  Top Layer w0.254: R59.2@84.791,151.799 84.791,150.83 87.661,147.96 87.661,145.6 84.28,142.219 84.28,139.369 82.69,137.779 82.69,127.838 84.181,126.349 86.561,126.349 v1(86.681,126.229) 89.79,123.118 96.871,123.118 97.841,122.148 U1.120@97.841,115.418
  Top Layer w0.3: R23.1@68.281,121.649 68.531,121.649 70.791,123.909 v1@85.221,123.909
  Bottom Layer w0.3: v1@85.221,123.909 85.221,124.769 v1(86.681,126.229)
  other v1: 85.221,123.909
USB1_DP_E: R59.1 USB2.7 | length 6.4
  Top Layer w0.4: R59.1@84.791,153.199 84.791,154.359 85.381,154.949 85.381,157.649 USB2.7@86.589,158.85
USB1_REXT: R52.2 U1.122 | length 4.3
  Top Layer w0.254: U1.122@97.041,115.418 R52.2@97.041,119.713
X2_IN: C47.2 U1.40 X2.1 | length 10.7
  Top Layer w0.25: C47.2@91.801,96.383 93.414,96.382 92.995,95.963 X2.1@93.153,95.963 92.835,95.963 93.892,97.02 97.031,97.02 97.443,97.431 U1.40@97.443,100.225
X2_OUT: C48.2 U1.41 X2.2 | length 5.5
  Top Layer w0.25: X2.2@96.449,95.915 96.449,96.248 97.42,96.248 97.844,96.672 U1.41@97.844,100.225
X_IN: C49.2 R55.1 U1.103 X3.1 | length 11
  Top Layer w0.254: U1.103@104.643,115.425 104.643,116.941 106.902,119.197 R55.1@106.9,119.797
  Top Layer w0.28: R55.1@106.899,119.796 106.899,122.298 107.341,122.737 107.702,122.737 X3.1@108.001,123.039 ; X3.1@108.001,123.039 109.345,123.039 C49.2@109.681,122.703
X_OUT: C46.2 R55.2 U1.104 X3.3 | length 8.7
  Top Layer w0.254: U1.104@104.244,115.425 104.244,117.135 106.067,119.008 R55.2@106.051,119.797
  Top Layer w0.28: C46.2@104.081,121.815 105.425,121.815 105.801,121.438 106.051,121.188 R55.2@106.051,119.797
XTAL1: C41.2 R50.1 U5.5 X1.1 | length 9.8
  Top Layer w0.24: 85.317,134.106 86.348,135.138 88.487,135.138 88.791,134.833 R50.1@89.215,134.833
  Top Layer w0.25: R50.1@89.217,134.833 89.217,134.852 U5.5@92.861,134.852
  Top Layer w0.28: 85.317,134.108 85.317,132.719 C41.2@85.529,132.507
XTAL2: C40.1 R50.2 U5.4 X1.3 | length 7.8
  Top Layer w0.24: X1.3@87.521,135.939 88.585,135.939 88.843,135.682 R50.2@89.217,135.682
  Top Layer w0.25: R50.2@89.217,135.682 89.643,135.682 89.972,135.352 U5.4@92.861,135.352
  Top Layer w0.28: C40.1@86.981,137.939 86.981,136.479 X1.3@87.521,135.939
pads on no net: B1.0 RJ1.15 RJ1.16 TF_CARD1.

## Polygon pours and split planes (outlines as drawn)
GND on Bottom Layer (solid): 38.14,203.408 153.96,203.668 154.22,54.308 38.14,54.828 38.1,203.368
GND on Top Layer (solid): 50.407,187.2 166.227,187.46 166.487,38.1 50.407,38.62 50.367,187.16

## Other copper
Top Layer:
  region net DCIN: 68.791,160.389 75.121,160.389 75.121,157.909 68.791,157.899 68.791,160.389

## Silkscreen, mask and mechanical layers (free items; w line width, h text height)
Top Overlay:
  text "G  R  T" at 133.965,152.412 h1.2 r90
  text "3V3          RXD / GND          TXD" at 107.957,134.181 h0.8 r90
  text "BOOT1 / BOOT0" at 69.213,88.509 h1.4 r90
  text "PG5(UART0MSG) / PG3(WTD) / PG8 / PG9" at 75.65,87.967 h1.4 r90
Bottom Overlay:
  text "Galaxy NUC980DK61 Dev Board 2.0(201907)" at 60.082,148.699 h1.5 r90

## Text inside footprints (layer, text, board x,y; h text height)
SW1: Top Overlay "ON" at 73.274,81.521 h0.5; Top Overlay "1" at 74.544,76.941 h0.5 r180; Top Overlay "2" at 77.084,76.959 h0.5 r180; Top Overlay "3" at 79.624,76.959 h0.5 r180; Top Overlay "4" at 82.18,76.896 h0.5 r145
SW2: Top Overlay "ON" at 66.824,81.521 h0.5; Top Overlay "1" at 68.094,76.941 h0.5 r180; Top Overlay "2" at 70.634,76.959 h0.5 r180